# Altium PCB ble-nrf52840-l-silivar-v1.2.PcbDoc
Units mm, origin at the board's own origin, x right, y up, seen from the top; angles counter-clockwise.
Board outline 18.25 x 15.4 mm, 4 copper layers (Top Layer, Mid Layer 1, Mid Layer 2, Bottom Layer), stack 1.583 mm thick; 35 components, 70 nets, 219 pads, 103 vias.
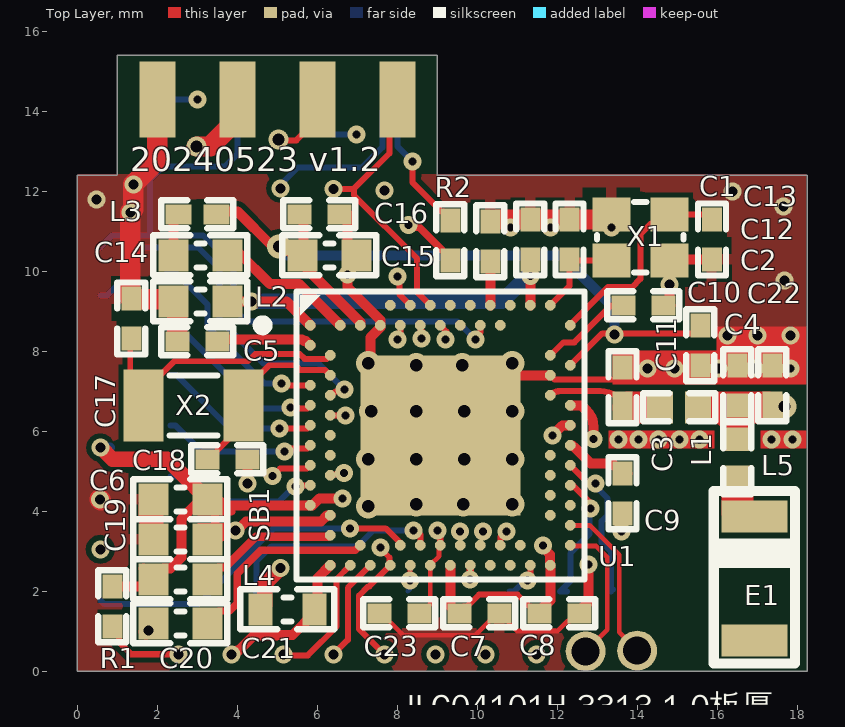
[diagram p0: Top Layer view]
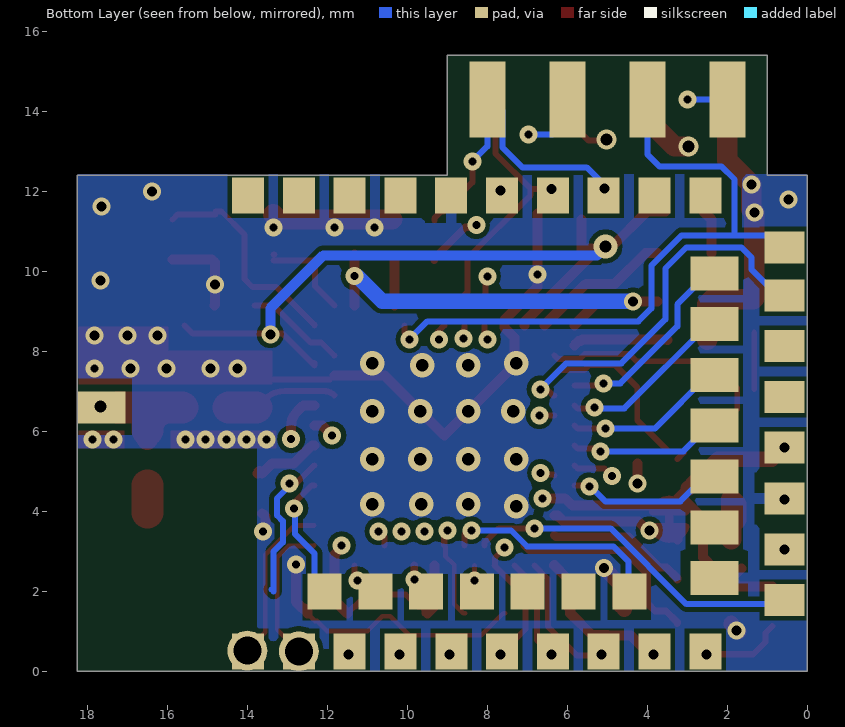
[diagram p1: Bottom Layer view, seen from below]
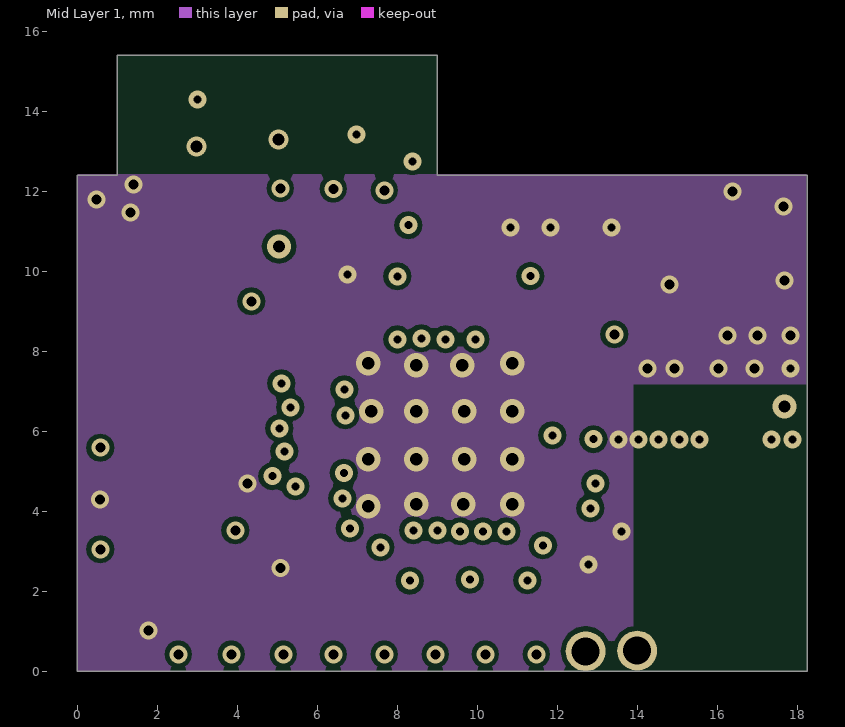
[diagram p2: Mid Layer 1]
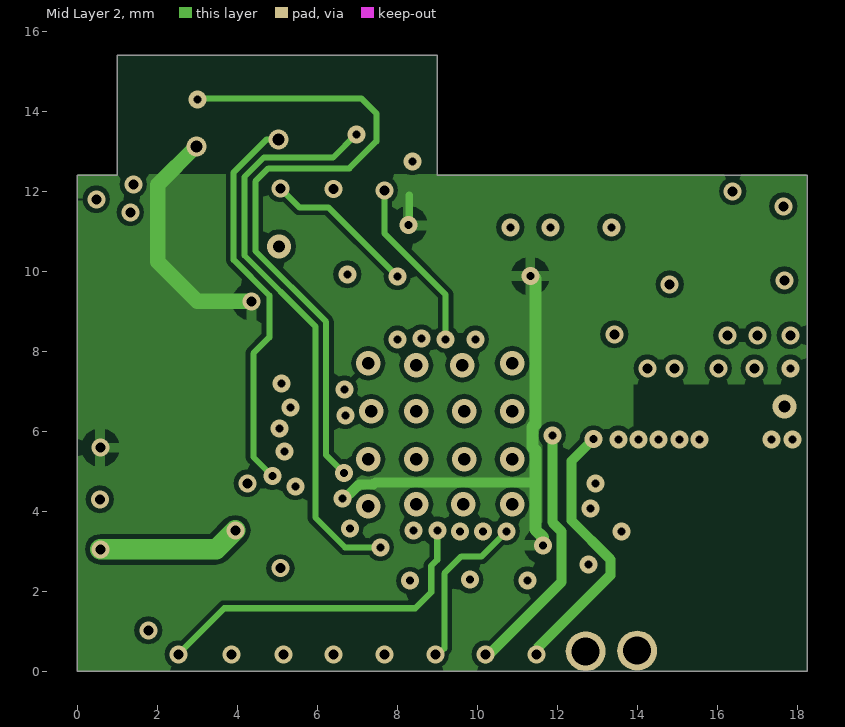
[diagram p3: Mid Layer 2]
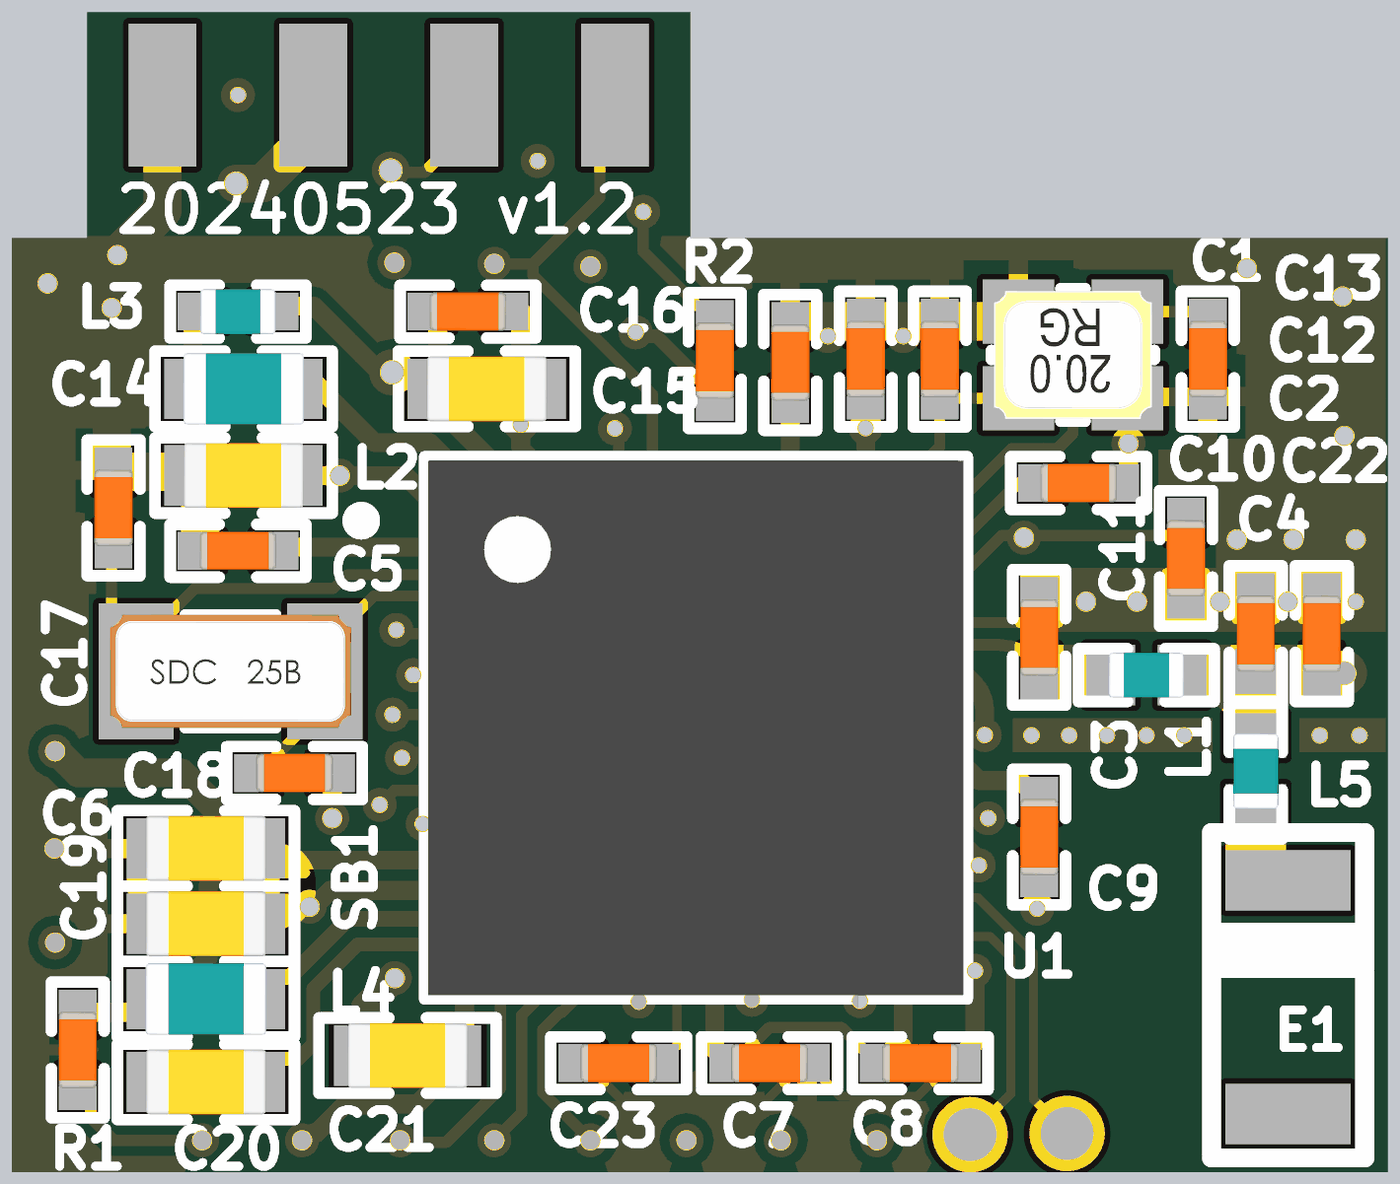
[diagram p4: 3D render of the assembled board from above, using the file's embedded part models]

## Layer stack, top to bottom
Top Solder: solder mask 0.0102, Solder Resist, Dk 3.5
Top Layer: signal copper 0.0356
Dielectric1: core 0.07, FR-4, Dk 4.8
Mid Layer 1: signal copper 0.036
Dielectric2: prepreg 1.3, Dk 4.2
Mid Layer 2: signal copper 0.036
Dielectric3: core 0.07, Dk 4.2
Bottom Layer: signal copper 0.0356
Bottom Solder: solder mask 0.0102, Solder Resist, Dk 3.5

## Board outline
0,0 0,12.4 1,12.4 1,15.4 9,15.4 9,12.4 18.25,12.4 18.25,0

## Design rules (kind name [scope] priority, off if disabled: settings)
Clearance Polygon_ANT [(InNamedPolygon('Top_Layer-GND')) or  (InNamedPolygon('Mid_Layer_1-GND')) or (InNamedPolygon('Mid_Layer_2-GND')) or (InNamedPolygon('Bottom_Layer-GND')) vs InNet('RF')] p1: gap=0.254 ignorepadtopadclearanceinfootprint=FALSE except(0: Arc-Hole Track-Hole SMDPad-Hole THPad-Hole Via-Hole Fill-Hole Poly-Hole Region-Hole Text-Hole)
Clearance Polygon [(InNamedPolygon('Top_Layer-GND')) or  (InNamedPolygon('Mid_Layer_1-GND')) or (InNamedPolygon('Mid_Layer_2-GND')) or (InNamedPolygon('Bottom_Layer-GND'))] p2: gap=0.254 ignorepadtopadclearanceinfootprint=FALSE except(0: Arc-Hole Track-Hole SMDPad-Hole THPad-Hole Via-Hole Fill-Hole Poly-Hole Region-Hole Text-Hole)
Clearance Clearance_Top [OnLayer('Top Layer')] p3: gap=0.13 ignorepadtopadclearanceinfootprint=FALSE except(0: Arc-Hole Track-Hole SMDPad-Hole THPad-Hole Via-Hole Fill-Hole Poly-Hole Region-Hole Text-Hole)
Clearance [All] p4: gap=0.12 ignorepadtopadclearanceinfootprint=FALSE except(0: Arc-Hole Track-Hole SMDPad-Hole THPad-Hole Via-Hole Fill-Hole Poly-Hole Region-Hole Text-Hole)
ComponentClearance [All] p1 off: gap=0.254 collisioncheckmode=3 verticalgap=0.254 showdistances=FALSE
FabricationTestPointUsage TestPointUsage [All] p1: valid=0 allowmultiple=FALSE
FabricationTestpoint Testpoint [(IsPad And (OnTopLayer Or OnBottomLayer))] p1: side=3 testpointundercomponent=TRUE minsize=1.016 maxsize=2.54 preferedsize=1.524 minholesize=0 maxholesize=1.016 preferedholesize=0.813 testpointgrid=0.025 allowsidetop=TRUE allowsidebottom=TRUE usegrid=TRUE gridtolerance=0
Height [All] p1 off: minheight=0 maxheight=25.4 prefheight=12.7
HoleSize [All] p1: absolutevalues=TRUE maxlimit=4.064 minlimit=0.1 maxpercent=80.000 minpercent=20.000
MinimumAnnularRing [All] p1 off: minimumring=0.152
PolygonConnect PolygonConnect_1 [isVia and innet(gnd)] p1: connectstyle=Direct reliefconductorwidth=0.254 reliefentries=4 polygonreliefangle="90 Angle" airgapwidth=0.254
PolygonConnect [All] p2: connectstyle=Relief reliefconductorwidth=0.254 reliefentries=4 polygonreliefangle="90 Angle" airgapwidth=0.254
RoutingVias [All] p1: holewidth=0.305 width=0.61 viastyle="Through Hole" minholewidth=0.1 minwidth=0.3 maxholewidth=0.305 maxwidth=0.61
SilkToSolderMaskClearance SilkscreenOverComponentPads [IsPad] p1: minsilkscreentomaskgap=0.254 clearancetoexposedcopper=TRUE
SolderMaskExpansion [All] p1: expansion=0.076 istentingtop=FALSE
Width [All] p1: maxlimit=2 minlimit=0.05 preferedwidth=0.15 midlayer1_minwidth=0.1 midlayer2_minwidth=0.1 bottomlayer_minwidth=0.1 minimp=50.000000 maximp=50.000000 favimp=50.000000
24 further rules are at their usual default settings.

## Components (designator, comment, footprint, x,y, rotation, side; value= is the part's Value field where it differs from the comment)
C1 "12pF" CAPC1005X04L#1 15.864,10.795 r270 top
C2 "12pF" CAPC1005X04L#1 12.308,10.795 r90 top
C3 "0.8pF" CAPC1005X04L#2 13.627,7.1 r270 top
C4 "0.5pF" CAPC1005X04L#3 16.5,7.15 r270 top
C5 "100nF" CAPC1005X04L#1 3,8.25 r180 top
C6 "4.7μF" CAPC1608X06L#1 2.575,4.3 r180 top value=4.7礔
C7 "100nF" CAPC1005X04L#1 10.05,1.45 r0 top
C8 "100nF" CAPC1005X04L#1 12.05,1.45 r0 top
C9 "820pF" CAPC1005X04L#1 13.627,4.45 r270 top
C10 "N.C." CAPC1005X04L#1 15.575,8.15 r90 top
C11 "100pF" CAPC1005X04L#1 14.15,9.15 r0 top
C12 "100nF" CAPC1005X04L#1 11.325,10.795 r90 top
C13 "N.C." CAPC1005X04L#1 10.325,10.75 r90 top
C14 "1.0μF" CAPC1608X06L#1 3.075,9.25 r180 top value=1.0礔
C15 "1.0μF" CAPC1608X06L#1 6.3,10.4 r180 top value=1.0礔
C16 "47nF" CAPC1005X04L#1 6.05,11.425 r0 top
C17 "12pF" CAPC1005X04L#1 1.35,8.82 r90 top
C18 "12pF" CAPC1005X04L#1 3.75,5.3 r0 top
C19 "4.7μF" CAPC1608X06L#1 2.575,3.3 r180 top value=4.7礔
C20 "4.7μF" CAPC1608X06L#1 2.575,1.2 r180 top value=4.7礔
C21 "4.7μF" CAPC1608X06L#2 5.25,1.55 r180 top value=4.7礔
C22 "N.C." CAPC1005X04L#4 17.375,7.15 r90 top
C23 "100nF" CAPC1005X04L#1 8.05,1.45 r0 top
E1 "RFANT3216120A5T" FILTER-SMD_1206-2P-L3.2-W1.6-L 16.93,2.325 r270 top
L1 "4.7nH" INDC1005X04L#1 15.049,6.6 r0 top
L2 "10μH" INDC1608X06L 3.075,10.4 r0 top value=10礖
L3 "15nH" INDC1005X04L#2 3,11.425 r180 top
L4 "10μH" INDC1608X06L 2.575,2.3 r0 top value=10礖
L5 "6.8nH" INDC1005X04L#3 16.5,5.325 r270 top value=4.7nH
R1 "10k" CAPC1005X04L#1 0.875,1.625 r90 top
R2 "330R" CAPC1005X04L#1 9.325,10.775 r270 top value=10k
SB1 "Solderbridge" Solderbridge_Shorted 3.45,3.8 r90 top net-tie
U1 "nRF52840-QIAA" AQFN50P700X700X85_HS-74N 9.075,5.9 r0 top locked
X1 "32MHz" BT-XTAL_2016 14.075,10.85 r180 top
X2 "32.768kHz" XTAL_3215 2.9,6.65 r0 top

## Footprints (in the part's own frame and the unit in brackets; to place one, negate y for a bottom-side part, rotate by r counter-clockwise, add the part's x,y. Pads: shape width x height; smd on the part's side, far side on the other; paste and mask are expansions set on the pad)
AQFN50P700X700X85_HS-74N [mm] "AQFN, 73-Leads, Body 7.00x7.00mm, Pitch 0.50mm, Thermal Pad 4.95x4.95mm, IPC Medium Density"
  rect 4x4 smd mask+0.05: 74(0,0)
  round 0.275 smd paste+0.012 mask+0.05: A8(-1.25,3.25) A10(-0.75,3.25) A12(-0.25,3.25) A14(0.25,3.25) A16(0.75,3.25) A18(1.25,3.25) A20(1.75,3.25) A22(2.25,3.25) A23(2.75,3.25) AA24(3.25,-2.25) AB2(-2.75,-2.5) AC5(-2,-2.75) AC9(-1,-2.75) AC11(-0.5,-2.75) AC13(0,-2.75) AC15(0.5,-2.75) AC17(1,-2.75) AC19(1.5,-2.75) AC21(2,-2.75) AC24(3.25,-2.75) AD2(-2.75,-3.25) AD4(-2.25,-3.25) AD6(-1.75,-3.25) AD8(-1.25,-3.25) AD10(-0.75,-3.25) AD12(-0.25,-3.25) AD14(0.25,-3.25) AD16(0.75,-3.25) AD18(1.25,-3.25) AD20(1.75,-3.25) AD22(2.25,-3.25) AD23(2.75,-3.25) B1(-3.25,2.75) B3(-2.5,2.75) B5(-2,2.75) B7(-1.5,2.75) B9(-1,2.75) B11(-0.5,2.75) B13(0,2.75) B15(0.5,2.75) B17(1,2.75) B19(1.5,2.75) B24(3.25,2.75) C1(-3.25,2.25) D2(-2.75,2) D23(2.75,2) E24(3.25,1.75) F2(-2.75,1.5) F23(2.75,1.5) G1(-3.25,1.25) H2(-2.75,1) H23(2.75,1) J1(-3.25,0.75) J24(3.25,0.75) K2(-2.75,0.5) L1(-3.25,0.25) L24(3.25,0.25) M2(-2.75,0) N1(-3.25,-0.25) N24(3.25,-0.25) P2(-2.75,-0.5) P23(2.75,-0.5) R1(-3.25,-0.75) R24(3.25,-0.75) T2(-2.75,-1) T23(2.75,-1) U1(-3.25,-1.25) U24(3.25,-1.25) V23(2.75,-1.5) W1(-3.25,-1.75) W24(3.25,-1.75) Y2(-2.75,-2) Y23(2.75,-2)
  silkscreen extent -4.56,-3.6 3.6,3.6, body extent -3.55,-3.55 3.55,3.55, height 0.85
BT-XTAL_2016 [mm] "Crystal 2.0 x 1.6 mm"
  rect 0.95x0.85 smd: 1(-0.725,-0.575) 2(0.725,-0.575) 3(0.725,0.575) 4(-0.725,0.575)
  silkscreen extent -1.08,-0.88 1.08,0.88, body extent -1.05,-0.85 1.05,0.85, height 0.56
CAPC1005X04L#1 [mm] "Chip Capacitor, 2-Leads, Body 1.0x0.5mm, IPC High Density"
  rect 0.6x0.5 smd: 1(-0.5,0) 2(0.5,0)
  silkscreen extent -0.9,-0.35 0.9,0.35, body extent -0.51,-0.25 0.51,0.25, height 0.5
CAPC1005X04L#2 [mm] "Chip Capacitor, 2-Leads, Body 1.0x0.5mm, IPC High Density"
  rect 0.6x0.5 smd: 1(-0.5,0)
  rect 0.8x0.5 smd: 2(0.5,0)
  silkscreen extent -0.9,-0.35 0.9,0.35, body extent -0.51,-0.25 0.51,0.25, height 0.5
CAPC1005X04L#3 [mm] "Chip Capacitor, 2-Leads, Body 1.0x0.5mm, IPC High Density"
  rect 0.6x0.5 smd: 1(-0.5,0)
  rect 0.6x0.54 smd: 2(0.5,0)
  silkscreen extent -0.9,-0.35 0.9,0.35, body extent -0.51,-0.25 0.51,0.25, height 0.5
CAPC1005X04L#4 [mm] "Chip Capacitor, 2-Leads, Body 1.0x0.5mm, IPC High Density"
  rect 0.7x0.5 smd: 1(-0.5,0)
  rect 0.6x0.5 smd: 2(0.5,0)
  silkscreen extent -0.9,-0.35 0.9,0.35, body extent -0.51,-0.25 0.51,0.25, height 0.5
CAPC1608X06L#1 [mm] "Chip Capacitor, 2-Leads, Body 1.6x0.8mm, IPC High Density"
  rect 0.75x0.8 smd: 1(-0.675,0) 2(0.675,0)
  silkscreen extent -1.17,-0.5 1.17,0.5, body extent -0.8,-0.43 0.8,0.43, height 0.8
CAPC1608X06L#2 [mm] "Chip Capacitor, 2-Leads, Body 1.6x0.8mm, IPC High Density"
  rect 0.6x0.8 smd: 1(-0.675,0) 2(0.675,0)
  silkscreen extent -1.17,-0.5 1.17,0.5, body extent -0.8,-0.43 0.8,0.43, height 0.8
FILTER-SMD_1206-2P-L3.2-W1.6-L [mm]
  rect 0.8x1.66 smd: 1(-1.55,0) 2(1.55,0)
  silkscreen extent -2.19,-1.02 2.13,1.02
INDC1005X04L#1 [mm] "Chip Inductor, 2-Leads, Body 1.0x0.5mm, IPC High Density"
  rect 0.65x0.8 smd: 1(-0.475,0) 2(0.475,0)
  silkscreen extent -0.9,-0.35 0.9,0.35, body extent -0.5,-0.3 0.5,0.3, height 0.5
INDC1005X04L#2 [mm] "Chip Inductor, 2-Leads, Body 1.0x0.5mm, IPC High Density"
  rect 0.65x0.5 smd: 1(-0.475,0) 2(0.475,0)
  silkscreen extent -0.9,-0.35 0.9,0.35, body extent -0.5,-0.3 0.5,0.3, height 0.5
INDC1005X04L#3 [mm] "Chip Inductor, 2-Leads, Body 1.0x0.5mm, IPC High Density"
  rect 0.59x0.8 smd: 1(-0.475,0)
  rect 0.6x0.8 smd: 2(0.475,0)
  silkscreen extent -0.9,-0.35 0.9,0.35, body extent -0.5,-0.3 0.5,0.3, height 0.5
INDC1608X06L [mm] "Chip Inductor, 2-Leads, Body 1.6x0.8mm, IPC High Density"
  rect 0.75x0.8 smd: 1(-0.675,0) 2(0.675,0)
  silkscreen extent -1.17,-0.5 1.17,0.5, body extent -0.8,-0.48 0.8,0.48, height 0.8
Solderbridge_Shorted [mm]
  round 0.2 smd paste-10: 1(-0.338,0) 2(0.338,0)
  Top Layer region: 0.102,0.432 0.178,0.505 0.296,0.467 0.361,0.424 0.434,0.351 0.488,0.292 0.546,0.193 0.574,0.099 0.569,-0.122 0.544,-0.193 0.46,-0.33 0.376,-0.411 0.284,-0.469 0.183,-0.5 0.132,-0.483 0.102,-0.43
  Top Layer region: -0.102,-0.432 -0.178,-0.505 -0.296,-0.467 -0.361,-0.424 -0.434,-0.351 -0.488,-0.292 -0.546,-0.193 -0.574,-0.099 -0.569,0.122 -0.544,0.193 -0.46,0.33 -0.376,0.411 -0.284,0.469 -0.183,0.5 -0.132,0.483 -0.102,0.43
  Top Layer lines w0.152: -0.178,0.431 ccw(c-0.068,0) -0.178,-0.431 ; 0.178,0.431 cw(c0.068,0) 0.178,-0.431
  Top Layer lines w0.203: -0.338,0 0.338,0
XTAL_3215 [mm] "XTAL SMD 3.2 x 1.5 mm"
  rect 1x1.8 smd: 1(-1.25,0) 2(1.25,0)
  silkscreen extent -0.6,-0.75 0.6,0.75, body extent -1.6,-0.75 1.6,0.75, height 0.81

## Part data
C1 C2 C17 C18: library part C0402-12p, "Capacitor, NP0, ?%", Footprint Doc=0402, LatestRevisionDate=2011-05-11, Note=50V, Part Number=C0402-12p, Pin Count=2, Published=2009-05-08, Publisher="Nordic Semiconductor"
C3: library part C0402-0.8p, "Capacitor, NP0, ?0%", Footprint Doc=0402, LatestRevisionDate=2012-11-21, Note=50V, Part Number=C0402-0.8p, Pin Count=2, Published=2009-05-08, Publisher="Nordic Semiconductor"
C4: library part C0402-0.5p, "Capacitor, NP0, ?0%", Footprint Doc=0402, LatestRevisionDate=2017-02-23, Note=50V, Part Number=C0402-0.5p, Pin Count=2, Published=2009-05-08, Publisher="Nordic Semiconductor"
C5 C7 C8 C12: library part C0402-100n, "Capacitor, X7R, ?0%", Footprint Doc=0402, LatestRevisionDate=2009-11-23, Note=16V, Part Number=C0402-100n, Pin Count=2, Published=2009-05-08, Publisher="Nordic Semiconductor"
C6 C20: library part C0603-4?-6.3V-X7R, "Capacitor, X7R, ?0%", Footprint Doc=0603, LatestRevisionDate=2015-06-10, Note=6.3V, Part Number=C0603-4?-6.3V-X7R, Pin Count=2, Published=2015-06-10, Publisher="Nordic Semiconductor"
C9: library part C0402-820p, "Capacitor, NP0, ?%", Footprint Doc=0402, LatestRevisionDate=2009-05-08, Note=50V, Part Number=C0402-820p, Pin Count=2, Published=2009-05-08, Publisher="Nordic Semiconductor"
C10 C13 C22: library part C0402-N.C., "Not mounted", Assembly="Not mounted", Footprint Doc=0402, LatestRevisionDate=2009-05-08, Part Number=C0402-N.C., Pin Count=2, Published=2009-05-08, Publisher="Nordic Semiconductor"
  C22: Note="Chip Cap"
C11: library part C0402-100p, "Capacitor, NP0, ?%", Footprint Doc=0402, LatestRevisionDate=2009-05-08, Note=50V, Part Number=C0402-100p, Pin Count=2, Published=2009-05-08, Publisher="Nordic Semiconductor"
C14 C15: library part C0603-1?, "Capacitor, X7R, ?0%", Footprint Doc=0603, LatestRevisionDate=2013-06-05, Note=16V, Part Number=C0603-1?, Pin Count=2, Published=2009-05-08, Publisher="Nordic Semiconductor"
C16: library part C0402-47n, "Capacitor, X7R, ?0%", Footprint Doc=0402, LatestRevisionDate=2009-05-08, Note="Chip Cap 10%", Part Number=C0402-47n, Pin Count=2, Published=2009-05-08, Publisher="Nordic Semiconductor"
C19 C21: library part C0603-4?-10V-X7S, "Capacitor, X7S, ?0%", Footprint Doc=0603, LatestRevisionDate=2016-08-15, Note=10V, Part Number=C0603-4?-10V-X7S, Pin Count=2, Published=2016-08-15, Publisher="Nordic Semiconductor"
C23: library part C0201-100n, "Capacitor, X5R, ±10%", Manufacturer=N.A., Part number IPS="00000001248, 00000002505", Artikkelnr Noca=N.A., Author=rsk, Component Class=Capacitors, ComponentLink1Description=Datasheet, ComponentLink1URL=N.A., ComponentLink2Description="Supplier link", ComponentLink2URL=N.A., Footprint Doc=0201, HelpURL=N.A., LatestRevisionDate=2017-11-09, Manufacturer Part Number=N.A., Note=16V, Pad Count=2, Part Number=C0201-100n, Part number Norautron=N.A., PartId=100200078, Published=2014-11-13, Supplier 1=N.A., Supplier 2=N.A., Supplier Part Number 1=N.A., Supplier Part Number 2=N.A.
E1: library part Antenna, "Generic Antenna", LatestRevisionDate=17-Jul-2002, LatestRevisionNote="Re-released for DXP Platform.", PackageReference=PIN1, Published=24-Mar-1999, Publisher="Altium Limited"
L1 L5: library part L0402-4n7, "High frequency chip inductor ?%", Footprint Doc=0402, LatestRevisionDate=2012-09-19, Note="High frequency chip inductor ?%", Part Number=L0402-4n7, Pin Count=2, Published=2009-05-08, Publisher="Nordic Semiconductor"
L2: library part L0603-10?, "Chip inductor, IDC,min = 50 mA, ?0%", Footprint Doc=0603, LatestRevisionDate=2012-09-19, Part Number=L0603-10?, Pin Count=2, Published=2010-02-24, Publisher="Nordic Semiconductor"
L3: library part L0402-15n, "High frequency chip inductor ?0%", Footprint Doc=0402, LatestRevisionDate=2012-09-19, Part Number=L0402-15n, Pin Count=2, Published=2010-07-12, Publisher="Nordic Semiconductor"
L4: library part L0603-10?, "Chip inductor, IDC,min = 80 mA, ?0%", Footprint Doc=0603, LatestRevisionDate=2012-09-19, Part Number=L0603-10?, Pin Count=2, Published=2010-02-24, Publisher="Nordic Semiconductor"
R1 R2: library part R0201-10k, "Resistor, ±1%, 0.05W", Manufacturer=N.A., Part number IPS=00000001255, Artikkelnr Noca=N.A., Author=rsk, Component Class=Resistors, ComponentLink1Description=Datasheet, ComponentLink1URL=N.A., ComponentLink2Description="Supplier link", ComponentLink2URL=N.A., Footprint Doc=0201, HelpURL=N.A., LatestRevisionDate=2014-11-13, Manufacturer Part Number=N.A., Note="Chip Res 1%", Pad Count=2, Part Number=R0201-10k, Part number Norautron=N.A., PartId=100100065, Published=2014-11-13, Supplier 1=N.A., Supplier 2=N.A., Supplier Part Number 1=N.A., Supplier Part Number 2=N.A.
SB1: library part "Solderbridge Shorted", "Shorted Solderbridge", Manufacturer=N.A., Artikkelnr Noca=N.A., Author=rsk, Component Class=Connectors, ComponentLink1Description=Datasheet, ComponentLink1URL=N.A., ComponentLink2Description="Supplier link", ComponentLink2URL=N.A., Footprint Doc=Solderbridge_Shorted, HelpURL=N.A., LatestRevisionDate=2012-08-07, Manufacturer Part Number=N.A., Note=N.A., Pad Count=2, Part Number="Solderbridge Shorted", Part number IPS=N.A., Part number Norautron=N.A., PartId=100500459, Published=2012-08-07, Supplier 1=N.A., Supplier 2=N.A., Supplier Part Number 1=N.A., Supplier Part Number 2=N.A.
U1: library part nRF52840-QIAAD0, "Multi-protocol Bluetooth Low Energy, IEEE 802.15.4, ANT and 2.4GHz proprietary system-on-chip", Manufacturer="Nordic Semiconductor", Footprint Doc=AQFN-73, LatestRevisionDate=2018-12-04, Manufacturer Part Number=nRF52840-QIAAD0, Part Number=nRF52840-QIAAD0, Pin Count=73, Published=2018-12-04, Publisher="Nordic Semiconductor"
X1: library part XTAL_SMD2016_32MHz_8pF_General, "XTAL SMD 2016, 32MHz, Cl=8pF, Total Tol: ?0ppm", Footprint Doc=XTAL_2016, LatestRevisionDate=2016-08-19, Part Number=XTAL_SMD2016_32MHz_8pF_General, Pin Count=4, Published=2016-08-19, Publisher="Nordic Semiconductor"
X2: library part XTAL_SMD3215_32.768kHz_9pF_General, "XTAL SMD 3215, 32.768kHz, Cl=9pF, Total Tol: ?0ppm", Footprint Doc=XTAL_3215, LatestRevisionDate=2016-08-19, Part Number=XTAL_SMD3215_32.768kHz_9pF_General, Pin Count=2, Published=2016-08-19, Publisher="Nordic Semiconductor"

## Free pads (board coordinates)
  rect 1x0.8 smd far side: 1(0.575,1.78) 1(0.575,3.05) 1(0.575,4.32) 1(0.575,5.59) 1(0.575,6.86) 1(0.575,8.13) 1(0.575,9.4) 1(0.575,10.6)
  rect 0.8x0.9 smd far side: 1(2.55,0.5) 1(2.55,11.9) 1(3.82,0.5) 1(3.823,11.9) 1(5.09,0.5) 1(5.093,11.9) 1(6.36,0.5) 1(6.363,11.9) 1(7.63,0.5) 1(7.633,11.9) 1(8.9,0.5) 1(8.903,11.9) 1(10.17,0.5) 1(10.173,11.9) 1(11.44,0.5) 1(11.443,11.9) 1(12.71,0.5) 1(12.713,11.9) 1(13.98,0.5) 1(13.983,11.9)
  round 0.3 on Mech16: 1(6.5,5.2) 1(6.5,5.7) 1(6.5,6.2) 1(6.5,6.7) 1(6.5,7.2) 1(8.25,3.45) 1(8.25,8.95) 1(8.75,3.45) 1(8.75,8.95) 1(9.25,3.45) 1(9.25,8.95) 1(9.75,3.45) 1(9.75,8.95) 1(10.25,3.45) 1(10.25,8.95) 1(10.75,3.45) 1(10.75,8.95) 1(11.25,3.45) 1(12,4.2) 1(12,4.7) 1(12,5.2) 1(12,5.7)
  rect 1.2x0.8 smd far side: 1(17.65,6.6)
  rect 1.2x0.85 smd far side: 12(2.325,9.95) 14(2.325,8.68) 16(2.325,7.41) 18(2.325,6.14) 20(2.325,4.87) 22(2.325,3.6) 24(2.325,2.33)
  rect 0.85x0.9 smd far side: 28(4.45,2) 30(5.72,2) 32(6.99,2) 34(8.26,2) 36(9.53,2) 38(10.8,2) 40(12.07,2)
  rect 0.9x1.9 smd: 45(2,14.3) 45(4,14.3) 45(6,14.3) 45(8,14.3)
  rect 0.9x1.9 smd far side: 45(2,14.3) 45(4,14.3) 45(6,14.3) 45(8,14.3)
  round 1 hole 0.7: 46(13.997,0.516) 47(12.71,0.5)

## Via types
v1: diameter 0.45, hole 0.2, Top Layer to Bottom Layer, tented both sides, 49 vias
v2: diameter 0.45, hole 0.25, Top Layer to Bottom Layer, tented both sides, 34 vias
v3: diameter 0.61, hole 0.305, Top Layer to Bottom Layer, tented both sides, 17 vias
v4: diameter 0.5, hole 0.3, Top Layer to Bottom Layer, tented both sides, 2 vias
v5: diameter 0.6, hole 0.3, Top Layer to Bottom Layer, tented both sides, 1 vias

## Nets (pads, with @x,y where several pads share a name; then routed paths per layer and width w, separated by ;. In a path a pad name is that pad's centre, name@x,y a point inside that pad or via, vN(x,y) a via of type N, cw(c..) or ccw(c..) an arc to the next point about the centre after c; other vN are vias at no path point)
D+: pad.1@6.36,0.5 U1.AD6 | length 2.6
  Top Layer w0.15: v2(6.4,0.425) 6.762,0.787 6.762,2.087 U1.AD6
D-: pad.1@5.09,0.5 U1.AD4 | length 3.3
  Top Layer w0.15: v2@5.15,0.4 5.765,0.4 6.482,1.117 6.482,2.307 U1.AD4
  other v2: 5.15,0.425
DEC1: C5.1 U1.C1 | length 2.4
  Top Layer w0.25: C5.1@3.5,8.28 3.52,8.3 5.62,8.3 5.662,8.257 5.718,8.257 U1.C1
DEC3: C11.1 U1.D23 | length 2.5
  Top Layer w0.15: U1.D23 11.831,7.9 12.156,8.225 12.425,8.225 13.35,9.15 C11.1@13.825,9.15
DEC4_6: C10.2 C15.2 C16.1 L3.1 U1.B5 U1.E24 | length 19.3
  Top Layer w0.15: U1.E24@12.325,7.708 U1.E24 13.125,8.45 15.375,8.45 C10.2
  Top Layer w0.25: L3.1@3.55,11.5 4,11.5 4.881,10.619 v3(5.044,10.619) ; v3@5.044,10.575 v3@5.226,10.575 ; C16.1@5.65,11.3 5.65,10.55 5.625,10.575 v3@5.226,10.575 ; U1.B5 7.075,8.726 v3@5.226,10.575
  Bottom Layer w0.25: v3(5.044,10.619) 5.044,10.607 5.251,10.4 12.1,10.4 13.425,9.075 v2(13.425,8.425)
GND: C1.2 C2.2 C3.1 C4.1 C5.2 C6.2 C7.2 C8.2 C9.2 C10.1 C11.2 C12.2 C13.2 C14.2 C15.1 C16.2 C17.2 C18.2 C19.2 C20.2 C21.2 C22.2 C23.1 pad.1@0.575,4.32 pad.1@8.903,11.9 pad.24 pad.45@2,14.3 U1.74 U1.B7 U1.F23 X1.2 X1.4 | length 38.1
  Top Layer w0.12: C23.1 7.6,1.45 8.15,0.9 9.95,0.9 10.425,1.375 10.625,1.375 10.99,1.01 12.01,1.01 12.26,1.26 12.31,1.26 C8.2@12.5,1.45
  Top Layer w0.145: U1.F23 11.93,7.295 13.47,7.295 13.627,7.452 C3.1@13.627,7.675
  Top Layer w0.25: C14.2@2.27,9.12 C14.2 ; v2(4.25,4.7) C18.2@4.25,5.2 ; C16.2@6.75,11.45 6.75,9.61 7.575,8.785 U1.B7 7.575,8.595 7.325,8.345 7.325,7.65 U1.74 v3(9.675,6.5) 10.575,7.4 U1.F23 ; C8.2@12.5,1.45 12.5,1.5 12.575,1.575 12.625,1.575 12.776,1.726 v1(12.776,2.675) ; v1@13.575,3.45 13.55,3.45 13.55,3.873 C9.2 ; C11.2@14.825,9.15 14.811,9.164 v2(14.811,9.675) 14.811,10.225 14.881,10.295 C1.2 ; C10.1 16.482,7.65 C22.2
  Top Layer w0.38: C20.2@1.715,0.99 1.9,1.175 C20.2 ; C21.2 4.685,1.66 4.685,2.183 4.7,2.198 v2(5.08,2.578)
  Top Layer w0.508: v2(0.566,4.3) v2@0.591,4.275 ; 1.779,3.784 1.779,4.179 C6.2 C19.2 ; pad.45@2,14.4 2,12.775 v2(1.4,12.175) 1.4,11.55 v2(1.325,11.475) 1.325,9.325 1.35,9.3 2.38,9.3 2.5,9.18 C5.2@2.5,8.28 ; C13.2@10.375,11.295 C2.2 13.22,11.295 X1.2
  other v1: 13.601,3.5 13.525,5.8 14.025,5.8 14.525,5.8 15.05,5.8 15.55,5.8 17.35,5.8 17.875,5.8 17.825,7.575 6.75,9.925 10.825,11.1 11.825,11.1 13.35,11.1
  other v2: 1.775,1.025 14.25,7.575 14.925,7.575 16.025,7.575 16.925,7.575 16.25,8.4 17,8.4 17.825,8.4 17.675,9.775 17.65,11.625 0.475,11.8 16.383,11.999
  other v3: 7.275,4.125 8.475,4.175 9.65,4.175 10.876,4.175 7.275,5.3 8.475,5.3 9.675,5.3 10.875,5.3 7.35,6.5 8.475,6.5 10.875,6.5 8.475,7.65 9.625,7.65 7.275,7.7 10.875,7.7
NetC3_2: C3.2 L1.1 U1.H23 | length 2.5
  Top Layer w0.156: U1.H23 cw(c12.079,6.646) 12.079,7.005 13.07,7.005 ; 13.072,7.005 cw(c13.072,6.309) C3.2@13.564,6.801
  Top Layer w0.8: C3.2@13.775,6.6 L1.1@14.475,6.6
NetC9_1: C9.1 U1.N24 | length 1.7
  Top Layer w0.25: U1.N24 cw(c12.325,5.517) 12.419,5.611 12.83,5.2 13.377,5.2 C9.1 ; C9.1@13.688,5.012 C9.1@13.75,4.95
NetC13_1: C13.1 U1.A18 | length 1.1
  Top Layer w0.25: U1.A18 C13.1
NetC20_1: C20.1 U1.AC5 | length 5.1
  Top Layer w0.184: C20.1 3.25,1.225 3.533,1.508 3.808,1.508 4,1.7 4,2.438 4.587,3.025 6.95,3.025 U1.AC5
NetE1_1: E1.1 L5.2 | length 0.7
  Top Layer w0.8: E1.1@16.5,3.975 L5.2@16.5,4.65
NetL2_1: L2.1 L3.2 | length 1.1
  Top Layer w0.25: L2.1@2.4,10.46 2.4,11.3 L3.2@2.6,11.5
NetL2_2: L2.2 U1.B3 | length 3.6
  Top Layer w0.25: L2.2@3.75,10.46 3.815,10.46 4.04,10.46 4.813,9.687 5.538,9.687 U1.B3
NetL4_2: L4.2 U1.AB2 | length 3.5
  Top Layer w0.21: L4.2 3.25,2.325 3.52,2.595 3.695,2.595 4.467,3.367 5.417,3.367 ; 5.417,3.367 6.292,3.367 U1.AB2
P0.00/XL1: C17.1 U1.D2 X2.1 | length 7
  Top Layer w0.145: X2.1@1.325,7.05 C17.1@1.325,8.467 ; X2.1@1.75,6.55 1.75,7.075 2.425,7.75 3.564,7.75 3.566,7.753 4.271,7.753 4.45,7.932 5.525,7.932 5.527,7.93 5.564,7.93 5.684,7.81 6.235,7.81 U1.D2
P0.01/XL2: C18.1 U1.F2 X2.2 | length 4.6
  Top Layer w0.145: C18.1@3.082,5.468 C18.1 ; C18.1@3.5,5.525 4.25,6.275 X2.2@4.25,6.65 ; X2.2@4.25,6.55 X2.2@4.25,6.65 ; U1.F2 6.19,7.535 5.57,7.535 5.455,7.65 4.8,7.65 4.25,7.1 X2.2@4.25,6.65
P0.02/AIN0: pad.1@6.363,11.9 pad.45@8,14.3 U1.A12 | length 6.9
  Top Layer w0.15: v2(6.4,12.06) 6.915,12.06 ; pad.45@8,14.3 7.8,14.1 7.8,12.945 6.915,12.06 ; U1.A12 8.499,9.476 8.499,10.319 6.915,11.903 6.915,12.06
P0.03/AIN1: pad.1@7.633,11.9 U1.B13 | length 4.6
  Top Layer w0.15: U1.B13 v1@9.23,8.495
  Mid Layer 2 w0.15: v2(7.675,12.025) 7.675,10.95 9.21,9.415 v1(9.21,8.3)
P0.04/AIN2: pad.14 U1.J1 | length 4.4
  Top Layer w0.15: v1@5.325,6.575 5.75,6.575 U1.J1 U1.J1@5.819,6.65
  Bottom Layer w0.15: pad.14 2.47,8.68 4.575,6.575 v1@5.325,6.575
  other v1: 5.325,6.6
P0.05/AIN3: U1.K2 | length 0.4
  Top Layer w0.15: U1.K2 v1(6.7,6.4)
P0.06: pad.16 U1.L1 | length 4.1
  Top Layer w0.15: v1(5.05,6.075) 5.75,6.075 U1.L1
  Bottom Layer w0.15: pad.16 2.47,7.41 3.805,6.075 v1(5.05,6.075)
P0.07: U1.M2
P0.08: pad.18 U1.N1 | length 3.9
  Top Layer w0.15: v1(5.175,5.5) 5.25,5.575 5.75,5.575 U1.N1
  Bottom Layer w0.15: pad.18 2.46,6.14 3.1,5.5 v1(5.175,5.5) v1@5.1,5.575
P0.09/NFC1: pad.1@10.17,0.5 U1.L24 | length 7
  Top Layer w0.25: v1(11.876,5.9) 11.88,5.9 12.125,6.145 12.32,6.145 U1.L24
  Mid Layer 2 w0.25: v2@10.2,0.325 12.112,2.237 12.112,3.49 11.876,3.726 v1(11.876,5.9)
  other v2: 10.2,0.425
P0.10/NFC2: pad.1@11.44,0.5 U1.J24 | length 8.1
  Top Layer w0.25: U1.J24 12.6,6.65 12.75,6.5 cw(c12.377,6.127) 12.905,6.127 v1(12.905,5.804)
  Mid Layer 2 w0.25: v2@11.5,0.35 11.5,0.575 13.325,2.4 13.325,2.8 12.356,3.769 12.356,5.255 v1(12.905,5.804)
  other v2: 11.475,0.425
P0.11: pad.45@2,14.3 U1.T2 | length 18.3
  Top Layer w0.15: U1.T2 6.349,4.924 6.632,4.924 v1(6.666,4.959)
  Mid Layer 2 w0.15: v1@3,14.325 7.1,14.325 7.475,13.95 7.475,13.25 6.8,12.575 4.775,12.575 4.45,12.25 4.45,10.507 6.22,8.737 6.22,5.405 v1(6.666,4.959)
  Bottom Layer w0.15: pad.45@2,14.3 v1(3,14.3)
P0.12: pad.20 U1.U1 | length 3.9
  Top Layer w0.15: v1(5.45,4.625) 5.475,4.65 U1.U1
  Bottom Layer w0.15: pad.20 2.555,4.87 3.175,4.25 5.05,4.25 5.433,4.633 5.442,4.633 v1(5.45,4.625)
P0.13: pad.1@7.63,0.5 pad.45@6,14.3 U1.AD8 | length 18.6
  Top Layer w0.15: v1(7.575,3.1) 7.575,3.075 7.806,2.844 7.806,2.669 U1.AD8 7.3,2.125 7.275,2.125 7.045,1.895 7.045,1.055 v2(7.675,0.425)
  Mid Layer 2 w0.15: v1(6.975,13.425) 6.395,12.845 4.663,12.845 4.18,12.362 4.18,10.395 5.95,8.625 5.95,3.843 6.693,3.1 v1(7.575,3.1)
  Bottom Layer w0.15: pad.45@6.225,13.575 6.375,13.425 v1(6.975,13.425)
P0.14: pad.1@0.575,1.78 U1.AC9 | length 8.5
  Top Layer w0.15: v1(6.815,3.572) 7.711,3.572 8.075,3.209 U1.AC9
  Bottom Layer w0.15: pad.1@0.575,1.78 0.675,1.68 3.023,1.68 4.915,3.572 v1(6.815,3.572)
P0.15: pad.34 U1.AD10 | length 0.7
  Top Layer w0.12: v1(8.316,2.266) 8.321,2.271 8.321,2.644 U1.AD10
  Bottom Layer w0.12: pad.34 8.316,2.056 v1(8.316,2.266)
P0.16: pad.28 U1.AC11 | length 5.4
  Top Layer w0.15: v1@8.5,3.5 8.575,3.425 U1.AC11
  Bottom Layer w0.15: pad.28 4.475,2.025 4.475,2.75 4.85,3.125 7.006,3.125 7.401,3.52 8.395,3.52 v1(8.4,3.525) ; v1@8.463,3.463 v1@8.5,3.5
P0.17: 
P0.18/RESET: C23.2 pad.1@2.55,0.5 R1.1 U1.AC13 U1.AD12 | length 13
  Top Layer w0.12: C23.2 8.6,1.45 8.825,1.675 U1.AD12 8.825,2.658 9.045,2.879 9.045,3.12 U1.AC13
  Top Layer w0.152: R1.1 1.047,0.953 1.047,0.728 1.35,0.425 v2(2.525,0.425) ; U1.AC13 v1@9.075,3.5
  Mid Layer 2 w0.152: v2(2.525,0.425) 3.675,1.575 8.45,1.575 8.85,1.975 8.85,2.635 9,2.785 v1@9,3.454 ; v1(9,3.525) v1@9,3.454 ; v1@9.046,3.5 v1@9,3.454
P0.19: U1.AC15
  other v1: 9.57,3.5
P0.20: pad.36 U1.AD16 | length 0.4
  Top Layer w0.184: v1@9.825,2.2 U1.AD16
  other v1: 9.816,2.291
P0.21: U1.AC17
  other v1: 10.14,3.5
P0.22: U1.AD18
P0.23: pad.1@8.9,0.5 U1.AC19 | length 4.7
  Top Layer w0.15: U1.AC19 10.575,3.156 10.575,3.375 10.7,3.5 v1(10.725,3.5)
  Mid Layer 2 w0.15: v2@8.911,0.311 9.175,0.575 9.175,2.45 9.6,2.875 10.109,2.875 10.725,3.491 v1(10.725,3.5)
  other v2: 8.95,0.425
P0.24: U1.AD20
P0.25: U1.AC21
P0.26: pad.12 U1.G1 | length 5.1
  Top Layer w0.15: v1@5.1,7.15 U1.G1 U1.G1@5.819,7.15
  Bottom Layer w0.15: pad.12@2.225,10.05 pad.12 2.475,9.95 3.25,9.175 3.25,8.625 4.675,7.2 v1(5.1,7.2)
P0.27: pad.1@0.575,9.4 U1.H2 | length 9.4
  Top Layer w0.15: U1.H2 6.359,6.9 6.452,6.993 6.618,6.993 v1(6.675,7.05)
  Bottom Layer w0.15: pad.1@0.575,9.4 0.75,9.4 1.4,10.05 1.4,10.35 1.65,10.6 3.018,10.6 3.55,10.068 3.55,8.8 4.65,7.7 6.026,7.7 v1(6.675,7.05)
P0.28/AIN4: U1.B11 | length 0.3
  Top Layer w0.15: U1.B11 8.575,8.55 8.585,8.54 8.588,8.54 8.6,8.528 v1(8.6,8.325)
P0.29/AIN5: pad.1@5.093,11.9 pad.45@8,14.3 R2.1 U1.A10 | length 12.8
  Top Layer w0.15: v1(8,9.875) 8.05,9.825 8.05,9.425 U1.A10 ; v1(8.375,12.75) 8.375,12.225 9.1,11.5 9.15,11.5 9.325,11.325 R2.1
  Mid Layer 2 w0.15: v2(5.075,12.075) 5.55,11.6 6.275,11.6 v1(8,9.875)
  Bottom Layer w0.15: pad.1@5.093,12.075 5.093,12.175 5.518,12.6 7.125,12.6 7.625,13.1 7.625,14.025 pad.45@8,14.4 ; pad.45@8,14.3 8,13.125 v1(8.375,12.75)
P0.30/AIN6: U1.B9 | length 0.4
  Top Layer w0.15: v1@8.05,8.295 8.055,8.295 8.075,8.315 U1.B9
  other v1: 8,8.295
P0.31/AIN7: U1.A8
P1.00: pad.38 U1.AD22 | length 1
  Top Layer w0.15: v1(11.25,2.275) 11.325,2.35 U1.AD22
  Bottom Layer w0.15: pad.38 10.925,2 11.2,2.275 v1(11.25,2.275)
P1.01: U1.Y23
P1.02: U1.W24
P1.03: U1.V23
P1.04: pad.40 U1.U24 | length 3.5
  Top Layer w0.15: U1.U24 12.384,4.65 12.811,4.223 12.929,4.105 12.929,4.084 12.92,4.075 v1(12.826,4.075)
  Bottom Layer w0.15: pad.40@12.241,2 pad.40 12.325,2.255 12.325,2.95 12.811,3.436 12.811,4.075 v1(12.826,4.075)
P1.05: U1.T23
P1.06: U1.R24 | length 3.8
  Top Layer w0.15: U1.R24 12.775,4.7 v1@12.9,4.7
  Bottom Layer w0.15: v1(12.95,4.7) 12.95,4.63 13.256,4.325 13.256,3.897 13.111,3.752 13.111,3.225 13.34,2.996 13.34,2 13.39,2.05
P1.07: U1.P23
P1.08: U1.P2
P1.09: pad.45@6,14.3 U1.R1 | length 12.5
  Top Layer w0.15: v1(4.88,4.878) v1(4.88,4.878) 5.07,5.07 5.745,5.07 U1.R1 ; v4(5.025,13.3) 5.05,13.275 5.475,13.275 6,13.8 pad.45@6,14.3
  Mid Layer 2 w0.15: v1(4.88,4.878) 4.4,5.358 4.4,7.95 4.8,8.35 4.8,9.393 3.91,10.283 3.91,12.474 4.736,13.3 v4(5.025,13.3)
P1.10: U1.A20
P1.11: U1.B19
P1.12: pad.1@0.575,10.6 pad.45@4,14.3 U1.B17 | length 16.8
  Top Layer w0.15: v1@9.9,8.3 10.075,8.475 U1.B17
  Bottom Layer w0.15: pad.1@0.575,10.6 0.875,10.9 1.8,10.9 ; pad.45@4,14.3 4,12.925 3.7,12.625 2.149,12.625 1.82,12.296 1.82,10.92 1.8,10.9 ; v1(9.95,8.3) 9.5,8.75 4.225,8.75 3.9,9.075 3.9,10.142 3.142,10.9 1.8,10.9
P1.13: U1.A16
P1.14: U1.B15
P1.15: U1.A14
RF: C4.2 C22.1 L1.2 L5.1 pad.1@17.65,6.6 | length 2.8
  Top Layer w0.5: C22.1@17.325,6.6 ccw(c17.325,6.65) C22.1
  Top Layer w0.54: L5.1 L5.1@16.5,6.025
  Top Layer w0.8: L1.2@15.625,6.6 15.925,6.6 ; L5.1@16.5,6.025 ccw(c15.925,6.025) 15.925,6.6 ; C22.1@17.25,6.6 15.925,6.6
  other v5: 17.675,6.625
SWDCLK: pad.1@13.98,0.5 pad.46 U1.AA24 | length 4.1
  Top Layer w0.12: U1.AA24 12.327,3.648 12.81,3.648 13.55,2.907 13.55,0.975 pad.46@14,0.525
SWDIO: pad.1@12.71,0.5 pad.47 U1.AC24 | length 3.6
  Top Layer w0.12: U1.AC24 12.345,3.13 12.974,3.13 13.25,2.854 13.25,1.04 pad.47
VBUS: C21.1 pad.1@3.82,0.5 U1.AD2 | length 3.8
  Top Layer w0.254: v2(3.85,0.425) 3.903,0.425 4.001,0.523 4.043,0.523 4.413,0.893 4.981,0.893 4.995,0.907 5.382,0.907 C21.1@5.925,1.45 ; C21.1 6.006,1.631 6.006,2.331 U1.AD2
VDD_HV: C19.1 pad.1@0.575,3.05 SB1.1 U1.Y2 | length 6.9
  Top Layer w0.25: C19.1 3.475,3.525 v2(3.95,3.525) 4.004,3.525 4.221,3.742 5.572,3.742 ; 5.572,3.742 6.09,3.742 6.249,3.9 U1.Y2
  Mid Layer 2 w0.508: v2(0.575,3.05) 3.475,3.05 v2(3.95,3.525)
VDD_NRF: C6.1 C7.1 C8.1 C12.1 C14.1 L4.1 pad.1@0.575,5.59 pad.45@4,14.3 R1.2 R2.2 SB1.2 U1.A22 U1.AD14 U1.AD23 U1.B1 U1.W1 | length 49.8
  Top Layer w0.15: C7.1@9.5,1.45 C7.1 9.575,1.45 9.575,1.55 9.65,1.625 9.75,1.625 10.045,1.92 11.005,1.92 11.3,1.625 11.325,1.625 C8.1@11.5,1.45
  Top Layer w0.18: v1(8.275,11.151) 8.327,11.099 8.551,11.099 9.325,10.325 R2.2
  Top Layer w0.25: R1.2 1.725,2.125 L4.1 L4.1@1.9,2.322 ; L4.1@1.65,2.575 1.9,2.325 L4.1@1.9,2.322 ; 2.475,5.075 2.821,4.73 ; C6.1@2.975,4.575 3,4.575 3,4.55 C6.1 3.093,4.3 2.605,3.812 2.605,2.848 2.328,2.572 2.15,2.572 L4.1@1.9,2.322 ; C6.1@3.35,4.157 3.361,4.145 5.875,4.145 6.055,4.325 v1(6.625,4.325) ; C14.1 3.753,9.247 v2(4.352,9.247) ; v2@4.352,9.25 5.225,9.25 U1.B1 ; U1.AD14 9.325,1.625 C7.1@9.5,1.45 ; U1.A22 v1(11.325,9.88) C12.1@11.325,10.425 ; C8.1@11.5,1.45 11.825,1.775 U1.AD23 11.82,2.655 11.82,2.918 11.642,3.096 v1(11.642,3.15)
  Top Layer w0.381: v2(0.575,5.59) 0.594,5.59 0.884,5.3 2.247,5.3 2.817,4.73 2.821,4.73 2.975,4.575 C6.1@2.983,4.567
  Top Layer w0.5: v4(2.975,13.125) 3.325,13.125 3.975,13.775 pad.45@3.975,14.225
  Mid Layer 2 w0.18: v1(8.275,11.151) 8.275,11.201 8.3,11.225 8.3,11.9
  Mid Layer 2 w0.25: v1(6.625,4.325) 6.679,4.325 6.779,4.425 6.798,4.425 7.048,4.675 7.4,4.675 7.45,4.725 11.35,4.725
  Mid Layer 2 w0.3: v1@11.35,9.925 11.45,9.825 11.45,6.175 11.381,6.105 11.381,5.607 11.45,5.538 11.45,3.541 11.642,3.35 v1(11.642,3.15)
  Mid Layer 2 w0.381: v4(2.975,13.125) 2.014,12.164 2.014,10.236 2.998,9.252 4.347,9.252 v2(4.352,9.247)
  Bottom Layer w0.25: pad.1@0.54,5.59 pad.1@0.557,5.608 ; v2(0.575,5.59) pad.1@0.815,5.59 ; v1@11.255,9.88 v1(11.325,9.88)
  Bottom Layer w0.381: v2(4.352,9.247) 4.357,9.252 10.627,9.252 v1@11.255,9.88
XC1: C1.1 U1.B24 X1.1 | length 5.4
  Top Layer w0.15: U1.B24 12.325,8.665 13.265,9.605 13.87,9.605 14.075,9.81 14.075,10.925 14.645,11.495 X1.1@14.8,11.495 ; X1.1 15.734,11.425 C1.1
XC2: C2.1 U1.A23 X1.3 | length 2.4
  Top Layer w0.15: U1.A23 12.308,9.633 C2.1 12.329,10.275 X1.3 ; X1.3@13.32,10.42 X1.3@13.35,10.42
pads on no net: E1.2

## Polygon pours and split planes (outlines as drawn)
GND on Mid Layer 1 "GND_L02_P000" (solid, remove dead copper, pour order 0): 0,0 18.225,0 18.225,12.425 0.025,12.425 0,12.4
GND on Top Layer "GND_L01_P001" (solid, remove dead copper, pour order 1): 0,0 18.225,0 18.225,12.425 0.025,12.425 0,12.4
VDD_NRF on Mid Layer 2 "VDD_NRF_L03_P002" (solid, remove dead copper, pour order 2): 0,0 18.225,0 18.225,12.425 0.025,12.425 0,12.4
GND on Bottom Layer "GND_L04_P003" (solid, remove dead copper, pour order 3): 0,0 18.225,0 18.225,12.425 0.025,12.425 0,12.4

## Other copper
Top Layer:
  rectangle net GND: 13.375,7.175 18.225,8.025
  rectangle net GND: 15.975,7.525 18.225,8.625
  rectangle net GND: 13.275,5.575 15.925,6.025
  rectangle net GND: 17.075,5.575 18.225,6.025
  pour cut-out: 18.225,0 13.775,0 13.775,8.6 18.225,8.6
  pour cut-out: 4.575,-0.05 4.575,1.45 7.075,1.45 7.075,-0.05
  pour cut-out: 12.407,5.575 15.15,5.575 15.15,7.425 14.35,7.425 14.35,8.471 12.407,8.471
Mid Layer 1:
  pour cut-out: 18.249,0 13.9,0 13.9,7.175 18.228,7.175
Mid Layer 2:
  pour cut-out: 18.225,0 13.9,0.024 13.9,7.175 18.225,7.175
Bottom Layer:
  pour cut-out: 18.25,0 13.75,0 13.75,5.575 18.25,5.575
  pour cut-out: 16.875,7.325 18.25,7.325 18.25,5.9 16.875,5.9

## Silkscreen, mask and mechanical layers (free items; w line width, h text height)
Top Overlay:
  text "20240523 v1.2" at 1.325,12.5 h0.6
  text "JLC04101H-3313 1.0板厚" at 8.123,-1.356 h1
Mechanical 1:
  lines w0.152: 8.975,15.4 1,15.4 1,12.4 0,12.4 0,0 18.25,0 18.25,12.4 9,12.4 9,15.4